# Altium PCB PCB1.PcbDoc
Units mm, origin at the board's own origin, x right, y up, seen from the top; angles counter-clockwise.
Board outline 46.61 x 47.37 mm, 2 copper layers (Top Layer, Bottom Layer); 27 components, 18 nets, 84 pads, 22 vias.
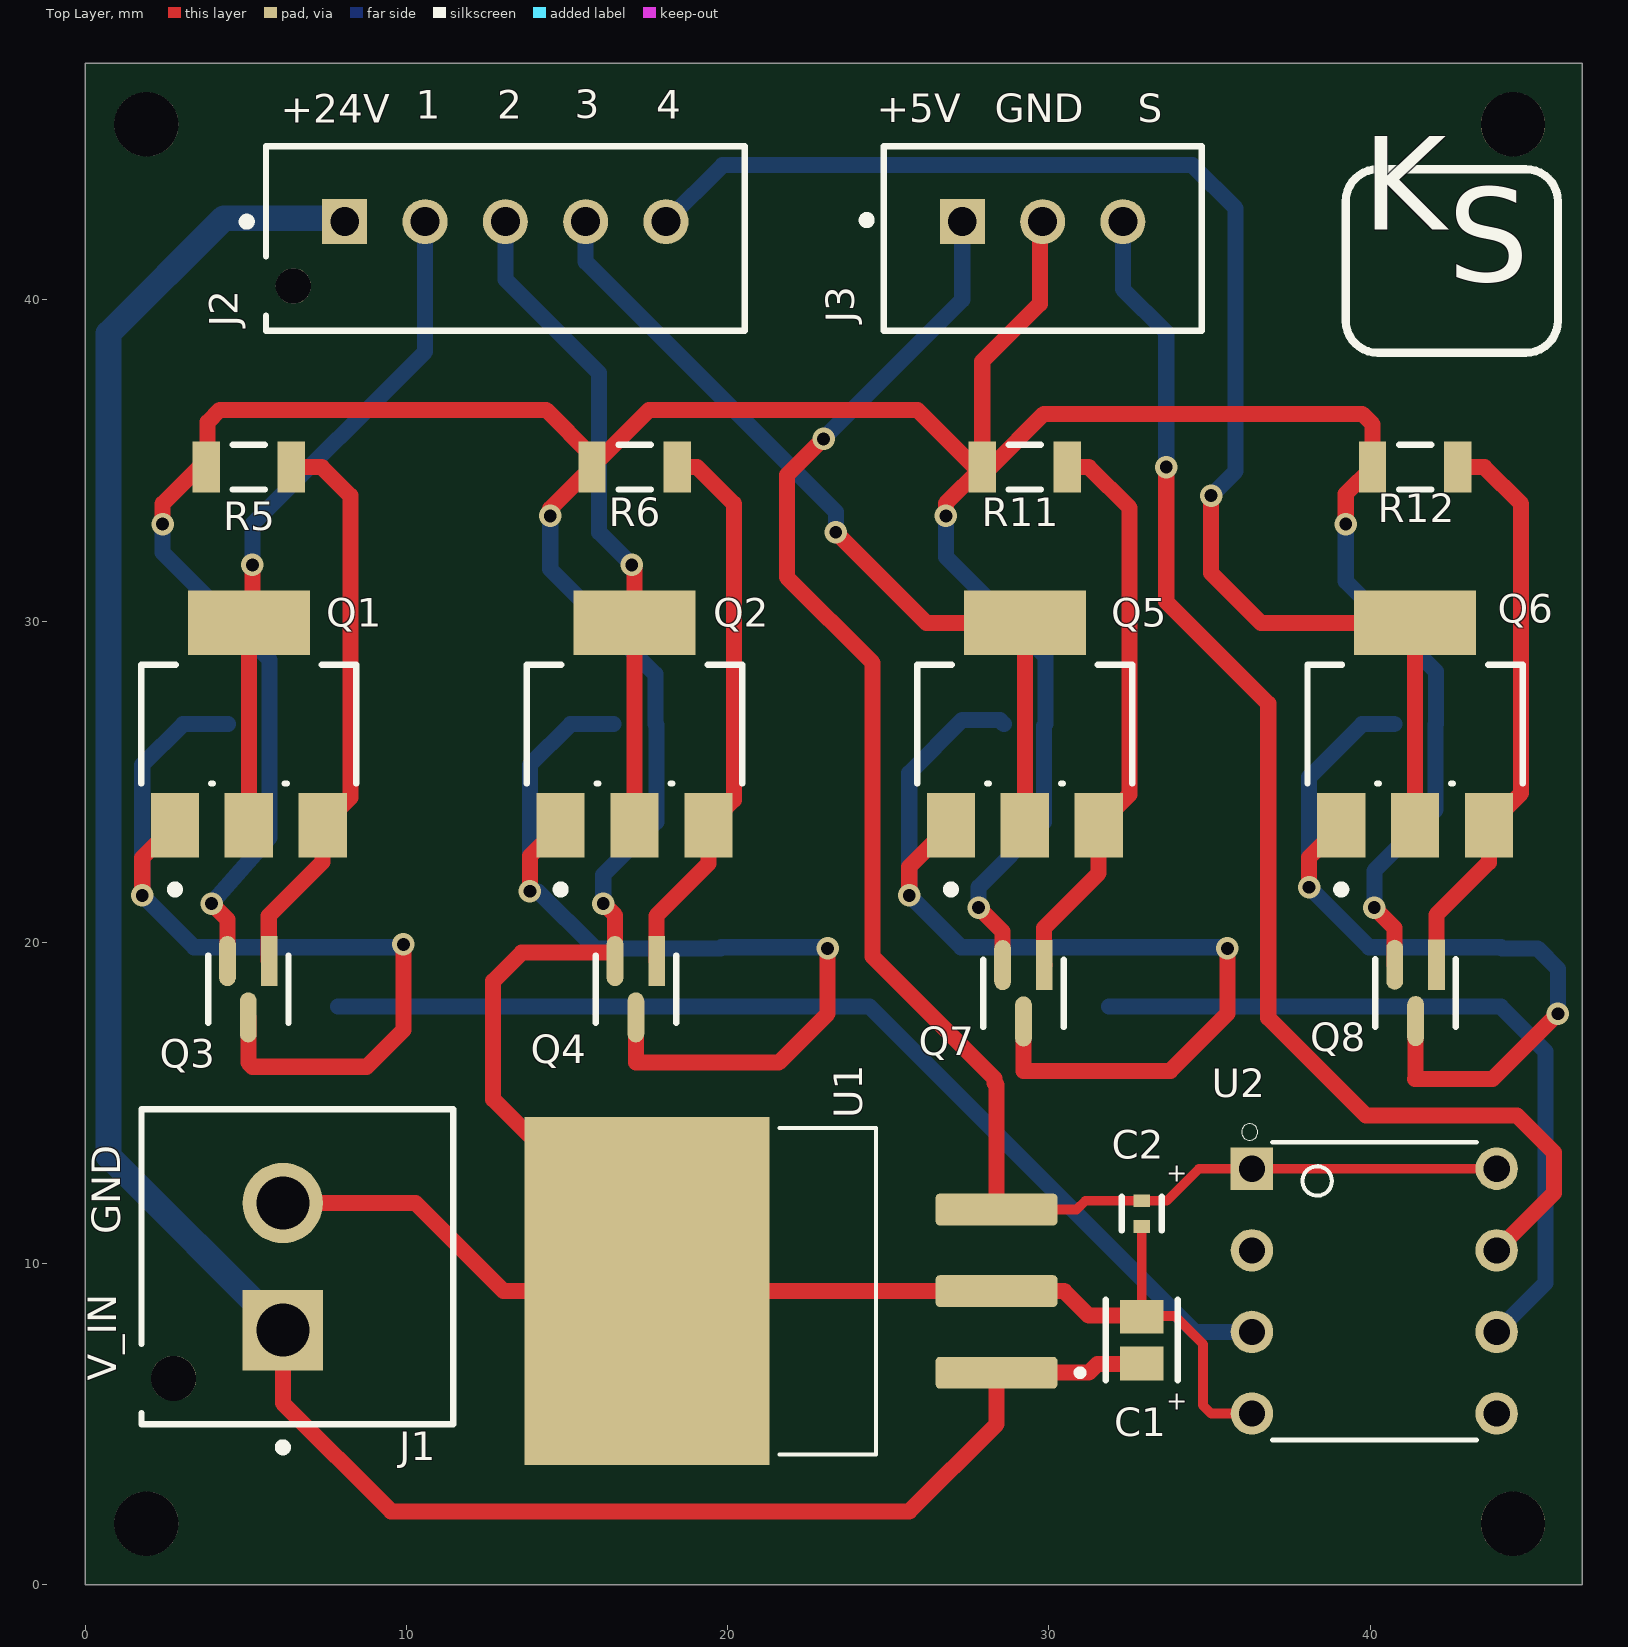
[diagram p0: Top Layer view]
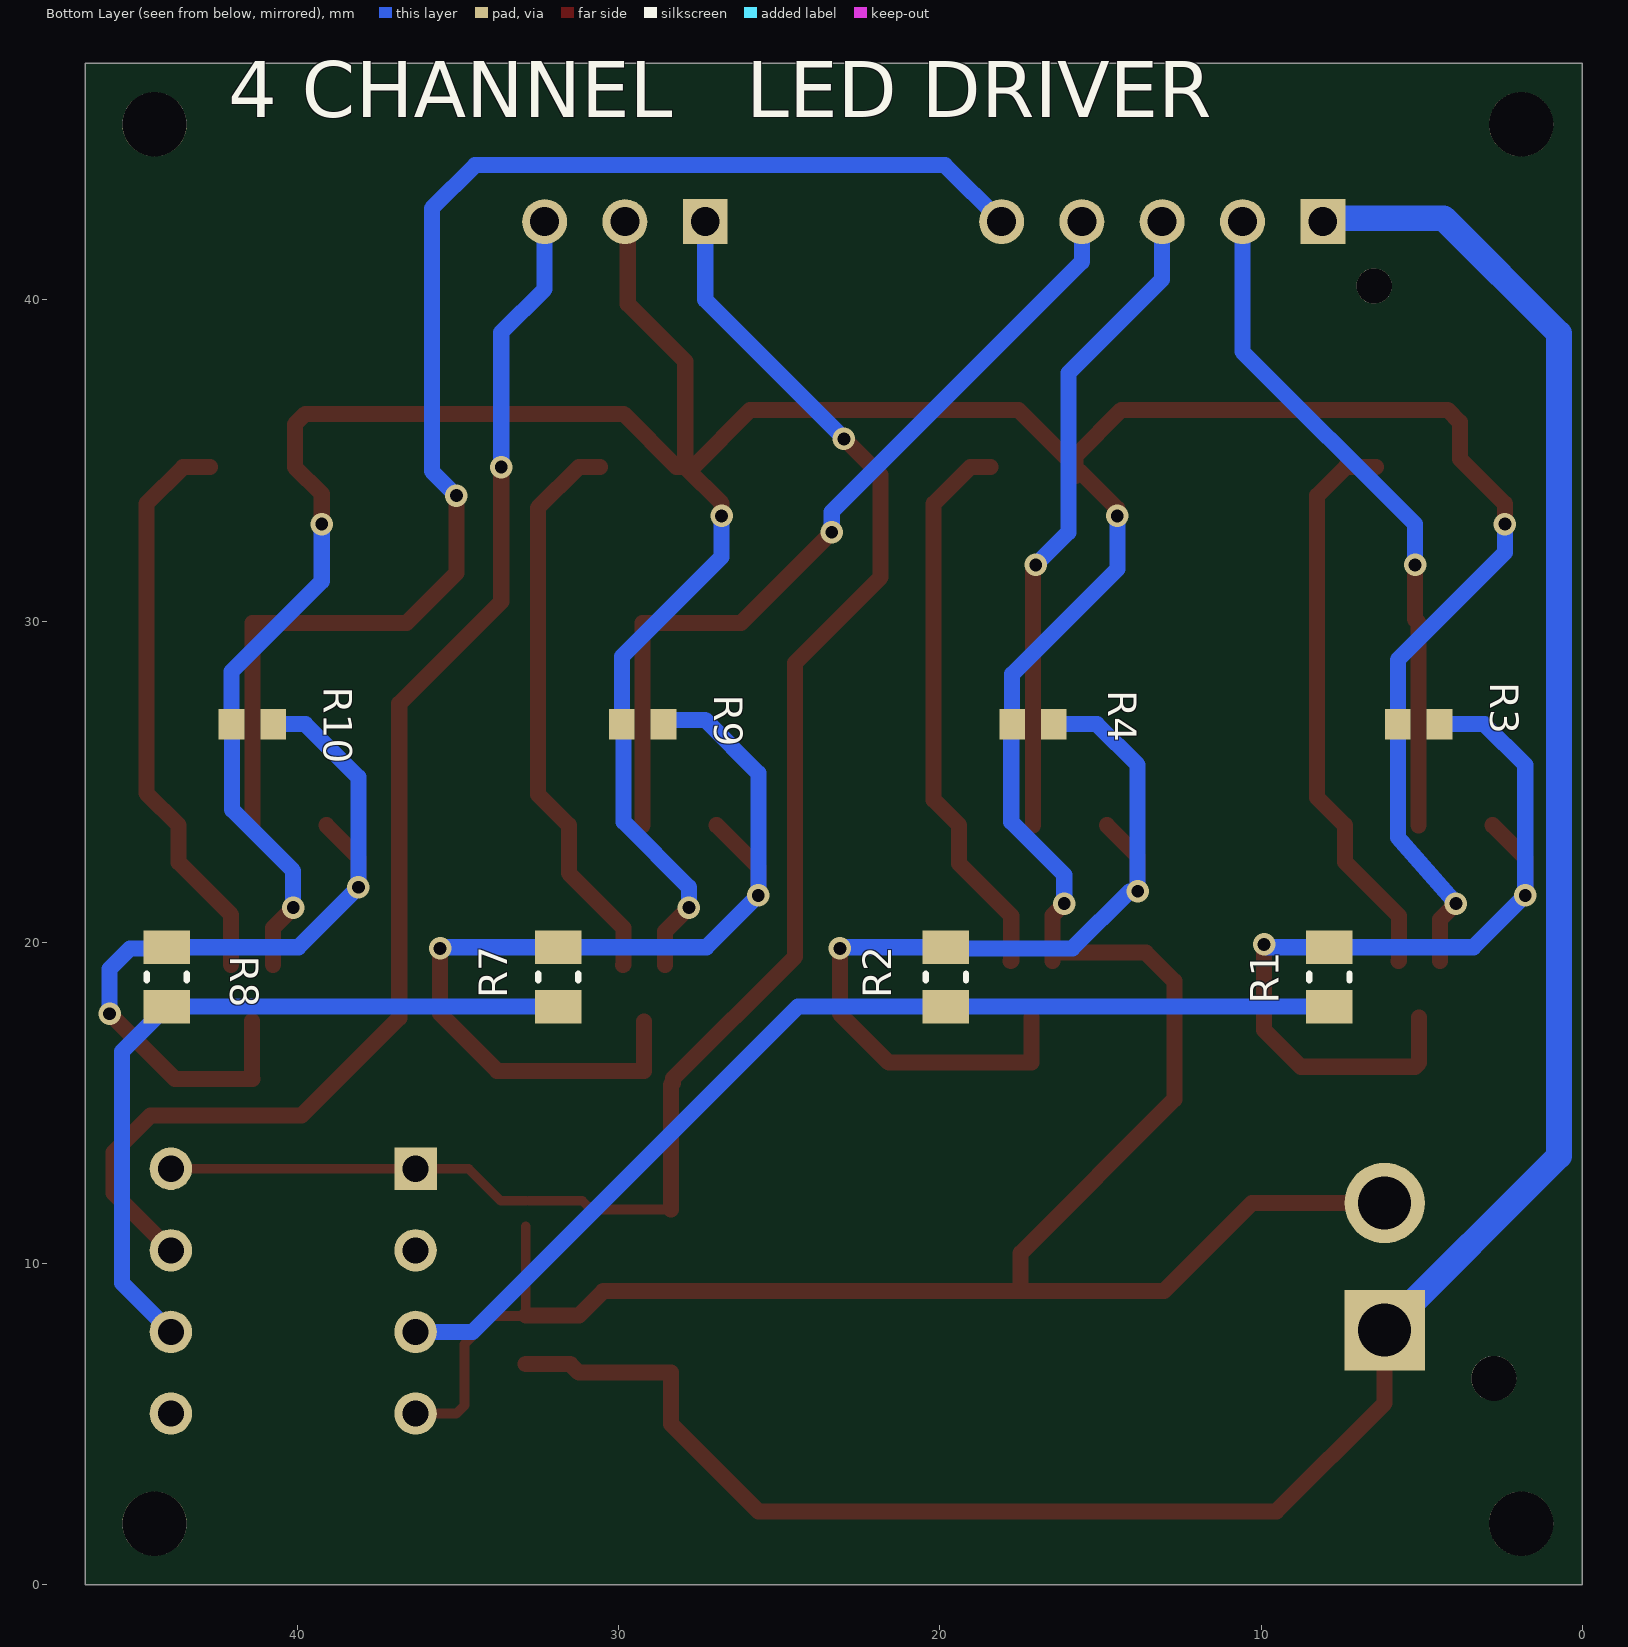
[diagram p1: Bottom Layer view, seen from below]
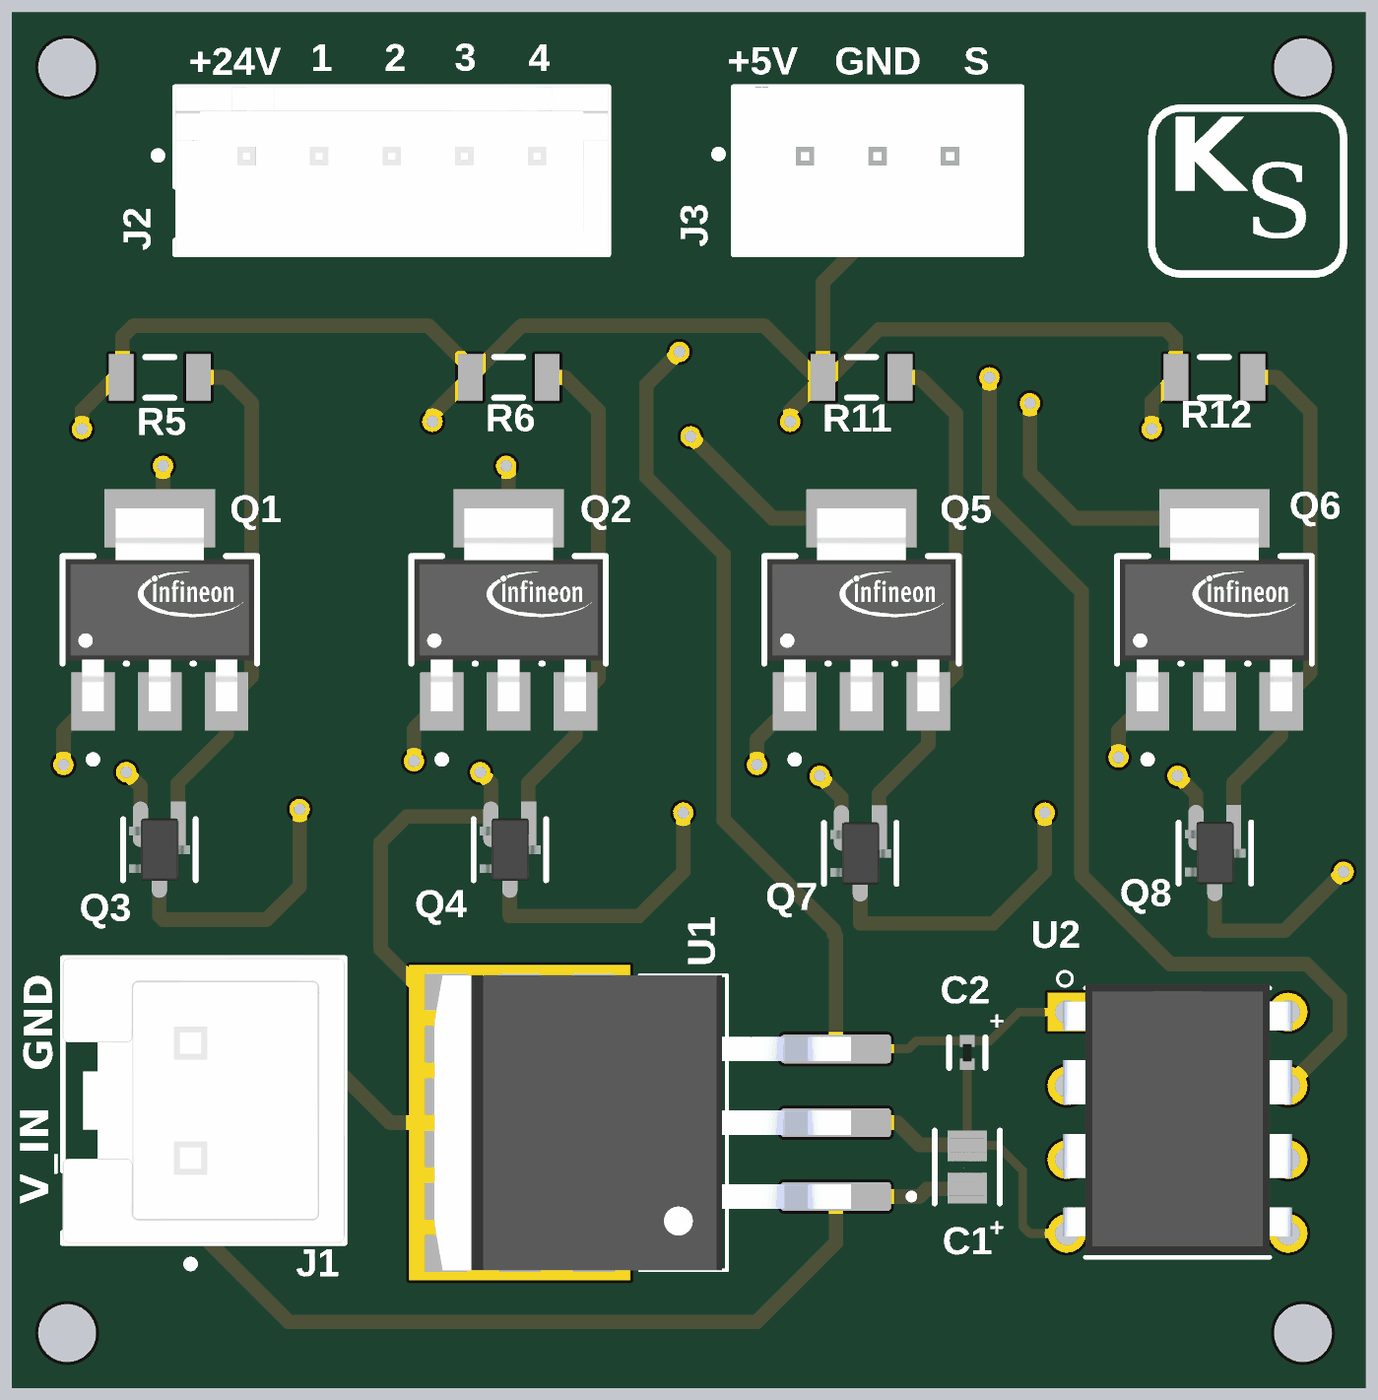
[diagram p2: 3D render of the assembled board from above, using the file's embedded part models]
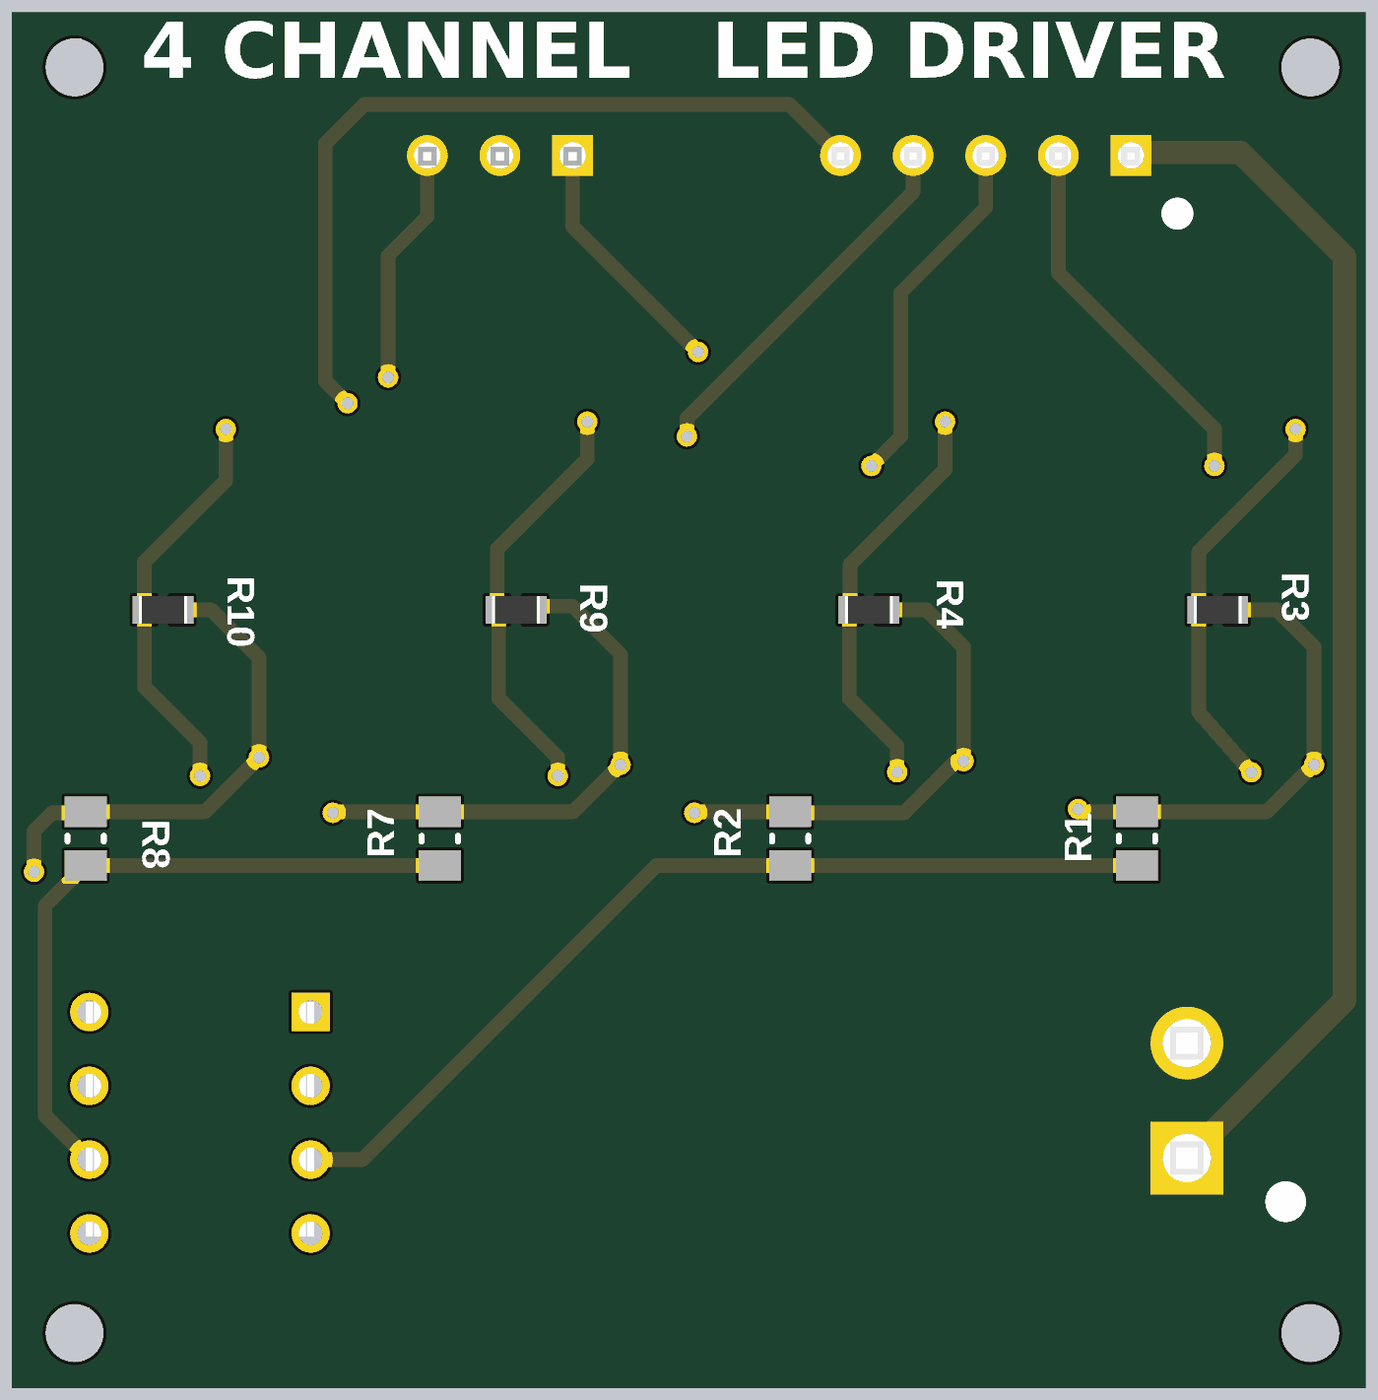
[diagram p3: 3D render of the assembled board from below, using the file's embedded part models]

## Layer stack, top to bottom
Top Solder: solder mask 0.0102, Solder Resist, Dk 3.5
Top Layer: signal copper 0.0356
Dielectric 1: dielectric 0.32, FR-4, Dk 4.8
Bottom Layer: signal copper 0.0356
Bottom Solder: solder mask 0.0102, Solder Resist, Dk 3.5

## Board outline
0,0 0,47.371 46.609,47.371 46.609,0

## Design rules (kind name [scope] priority, off if disabled: settings)
BoardOutlineClearance [All] p1: gap=0.254 ignorepadtopadclearanceinfootprint=FALSE except(0: Arc-SplitContinuation Track-SplitContinuation SMDPad-SplitContinuation THPad-SplitContinuation Via-SplitContinuation Fill-SplitContinuation Poly-SplitContinuation Region-SplitContinuation Text-SplitContinuation)
Clearance [All] p1: gap=0.254 ignorepadtopadclearanceinfootprint=FALSE except(0: Arc-Hole Track-Hole SMDPad-Hole THPad-Hole Via-Hole Fill-Hole Poly-Hole Region-Hole Text-Hole; 0.4: Arc-Arc Arc-Track Track-Track)
PolygonConnect [All] p1: connectstyle=Relief reliefconductorwidth=0.254 reliefentries=4 polygonreliefangle="90 Angle" airgapwidth=0.254
RoutingVias [All] p1: holewidth=0.4 width=0.6 viastyle="Through Hole" minholewidth=0 minwidth=0 maxholewidth=0.711 maxwidth=1.27
SilkToSilkClearance [All] p1: silktosilkclearance=0.15
SilkToSolderMaskClearance [IsPad] p1: minsilkscreentomaskgap=0.05 clearancetoexposedcopper=TRUE
SolderMaskExpansion [All] p1: expansion=0.102 istentingtop=FALSE
Width [All] p1: maxlimit=0.8 minlimit=0.3 preferedwidth=0.5
28 further rules are at their usual default settings.

## Classes and differential pairs
component class Sheet2: C2 J1 J3 U2
component class Sheet3: Q1 Q2 Q3 Q4 Q7 Q8 R1 R2 R3 R4 R9 R10 R11 R12

## Components (designator, comment, footprint, x,y, rotation, side; value= is the part's Value field where it differs from the comment)
C1 "CL21B104KBCNNNC" FP-CL21-IPC_C 32.893,7.62 r90 top value=0.10μF (schematic designator C2)
C2 "0.1uF 16V" FP-GRM15-MFG 32.893,11.557 r90 top (schematic designator C1)
J1 "B2P-VH-FB-B(LF)(SN)" FP-B2P-VH-FB-B_LF_SN-MFG 6.604,9.906 r270 top (schematic designator J2)
J2 "B5B-XH-AM(LF)(SN)" FP-B5B-XH-AM_LF_SN-MFG 13.081,41.91 r180 top (schematic designator J1)
J3 "B3B-XH-A(LF)(SN)" FP-B3B-XH-A_LF_SN-MFG 29.805,41.91 r0 top
Q1 "IRFL014N" FP-P-SOT223-3-MFG 5.095,26.797 r90 top
Q2 "IRFL014N" FP-P-SOT223-3-MFG 17.103,26.797 r90 top
Q3 "BC847CW,115" FP-SOT323-IPC_A 5.08,18.542 r270 top (schematic designator Q5)
Q4 "BC847CW,115" FP-SOT323-IPC_A 17.145,18.542 r270 top (schematic designator Q6)
Q5 "IRFL014N" FP-P-SOT223-3-MFG 29.252,26.797 r90 top (schematic designator Q3)
Q6 "IRFL014N" FP-P-SOT223-3-MFG 41.402,26.797 r90 top (schematic designator Q4)
Q7 "BC847CW,115" FP-SOT323-IPC_A 29.21,18.415 r270 top
Q8 "BC847CW,115" FP-SOT323-IPC_A 41.417,18.427 r270 top
R1 "680 ohm" RESC2013X50X30NL20T20 7.874,18.923 r90 bottom
R2 "680 ohm" RESC2013X50X30NL20T20 19.812,18.923 r90 bottom
R3 "10k 0.1W" RESC1609X50X30NL8T20 5.095,26.797 r180 bottom (schematic designator R5)
R4 "10k 0.1W" RESC1609X50X30NL8T20 17.103,26.797 r180 bottom (schematic designator R6)
R5 "2.4 ohm 1/4W" RESC3116X65X40LL10T20 5.095,34.798 r0 top (schematic designator R9)
R6 "2.4 ohm 1/4W" RESC3116X65X40LL10T20 17.103,34.798 r0 top (schematic designator R10)
R7 "680 ohm" RESC2013X50X30NL20T20 31.877,18.923 r90 bottom (schematic designator R3)
R8 "680 ohm" RESC2013X50X30NL20T20 44.069,18.923 r90 bottom (schematic designator R4)
R9 "10k 0.1W" RESC1609X50X30NL8T20 29.252,26.797 r180 bottom (schematic designator R7)
R10 "10k 0.1W" RESC1609X50X30NL8T20 41.402,26.797 r180 bottom (schematic designator R8)
R11 "2.4 ohm 1/4W" RESC3116X65X40LL10T20 29.252,34.798 r0 top
R12 "2.4 ohm 1/4W" RESC3116X65X40LL10T20 41.402,34.798 r0 top
U1 "LM7805SX/NOPB" TO254P1524X483-4N 21.971,9.144 r180 top (schematic designator U2)
U2 "ATTINY85-20PU" DIP762W46P254L927H533Q8B 40.132,9.144 r0 top (schematic designator U1)

## Footprints (in the part's own frame and the unit in brackets; to place one, negate y for a bottom-side part, rotate by r counter-clockwise, add the part's x,y. Pads: shape width x height; smd on the part's side, far side on the other; paste and mask are expansions set on the pad)
DIP762W46P254L927H533Q8B [mil]
  rect 52x52 hole 32: 1(-150,150)
  round 52 hole 32: 2(-150,50) 3(-150,-50) 4(-150,-150) 5(150,-150) 6(150,-50) 7(150,50) 8(150,150)
  silkscreen extent -163,-182 125,205, body extent -155,-178 155,188, height 212
FP-B2P-VH-FB-B_LF_SN-MFG [mm]
  rect 2.5x2.5 hole 1.65 paste-1000 mask+0: 1(1.98,-0.45)
  round 2.5 hole 1.65 paste-1000 mask+0: 2(-1.98,-0.45)
  round 1.4 hole 1.4 unplated paste-1000 mask+0: ""(3.48,-3.85)
  silkscreen extent -4.9,-4.85 5.75,4.85, body extent -5,-4.95 5,4.95, height 0.25
FP-B3B-XH-A_LF_SN-MFG [mm]
  rect 1.4x1.4 hole 0.9 paste-1000 mask+0: 1(-2.5,0.525)
  round 1.4 hole 0.9 paste-1000 mask+0: 2(0,0.525) 3(2.5,0.525)
  silkscreen extent -5.6,-2.88 4.95,2.88, body extent -5.05,-2.98 5.05,2.98, height 0.25
FP-B5B-XH-AM_LF_SN-MFG [mm]
  rect 1.4x1.4 hole 0.9 paste-1000 mask+0: 1(5,-0.525)
  round 1.4 hole 0.9 paste-1000 mask+0: 2(2.5,-0.525) 3(0,-0.525) 4(-2.5,-0.525) 5(-5,-0.525)
  round 1.1 hole 1.1 unplated paste-1000 mask+0: ""(6.6,1.475)
  silkscreen extent -7.45,-2.88 8.17,2.88, body extent -7.55,-2.98 7.55,2.98, height 0.25
FP-CL21-IPC_C [mm]
  rect 1.055x1.356 smd paste+0 mask+0: 1(-0.726,0) 2(0.726,0)
  silkscreen extent -1.25,-1.12 1.25,1.12, body extent -1.35,-0.82 1.35,0.82, height 0.25
FP-GRM15-MFG [mm]
  rect 0.4x0.5 smd paste+0 mask+0: 1(-0.4,0) 2(0.4,0)
  silkscreen extent -0.53,-0.63 0.53,0.63, body extent -0.7,-0.38 0.7,0.38, height 0.25
FP-P-SOT223-3-MFG [mm]
  rect 2x1.5 smd paste+0 mask+0: 1(-3.15,2.3) 2(-3.15,0) 3(-3.15,-2.3)
  rect 2x3.8 smd paste+0 mask+0: 4(3.15,0)
  silkscreen extent -5.27,-3.35 1.85,3.35, body extent -4.25,-3.45 4.25,3.45, height 0.25
FP-SOT323-IPC_A [mm]
  rect 1.559x0.522 smd paste+0 mask+0: 1(-0.877,0.65)
  rrect100% 1.559x0.522 smd paste+0 mask+0: 2(-0.877,-0.65) 3(0.877,0)
  silkscreen extent -1.05,-1.25 1.05,1.25, body extent -2.16,-1.5 2.16,1.5, height 0.25
RESC1609X50X30NL8T20 [mm] "Chip Resistor, 2-Leads, Body 1.65x0.95mm, IPC Medium Density"
  rect 0.8x0.95 smd: 1(-0.65,0) 2(0.65,0)
  body extent -0.82,-0.48 0.82,0.48, height 0.5
RESC2013X50X30NL20T20 [mm] "Chip Resistor, 2-Leads, Body 2.00x1.25mm, IPC Medium Density"
  rect 1.05x1.45 smd: 1(-0.925,0) 2(0.925,0)
  silkscreen extent -0.1,-0.63 0.1,0.63, body extent -1.1,-0.72 1.1,0.72, height 0.5
RESC3116X65X40LL10T20 [mm] "Chip Resistor, 2-Leads, Body 3.10x1.60mm, IPC High Density"
  rect 0.85x1.6 smd: 1(-1.325,0) 2(1.325,0)
  silkscreen extent -0.5,-0.7 0.5,0.7, body extent -1.6,-0.85 1.6,0.85, height 0.65
TO254P1524X483-4N [mm]
  rrect25% 3.79x0.99 smd: 1(-6.4,2.54) 2(-6.4,0) 3(-6.4,-2.54)
  rect 7.62x10.84 smd paste-6: 4(4.48,0)
  silkscreen extent -9.1,-5.08 0.35,5.08, body extent -6.92,-5.08 7.43,5.08, height 4.8

## Part data
C1: library part CMP-2100-03641-2, "CAP CER 0.1UF 16V X7R 0402", Capacitance=0.10μF, Manufacturer=Murata, Manufacturer Part Number=GRM155R71C104KA88D, Package=GRM15, Temperature="-55°C to +125°C", Temperature Characteristic=X7R, Temperature Range High=+125°C, Temperature Range Low=-55°C, Tolerance=10%, Voltage Rating=16Vdc, Category=Cap, ComponentLink2Description=Datasheet, ComponentLink2URL=https://search.murata.co.jp/Ceramy/image/img/A01X/G101/ENG/GRM155R71H471KA01-01A.pdf, Device Class L1="Passive Components", Device Class L2=Capacitors, Device Class L3="Ceramic Capacitors", Digikey Description="CAP CER 0.1UF 16V X7R 0402", Height=0.55mm, Ipc Land Pattern Name=CAPC10050X219, Lead Free=yes, Material=Ceramic, Mouser Description="0402 0.1 uF 16V ±10 % Tolerance X7R SMT Multilayer Ceramic Capacitor", Octopart=https://octopart.com/grm155r71c104ka88d-murata-196880, RoHS=TRUE, Standoff Height=0mm
C2: library part CMP-2000-05017-2, "CL21 Series 0805 100nF 50V ±10% Tolerance X7R Multilayer Ceramic Chip Capacitor", Capacitance=100nF, Case Code (Imperial)=0805, Case Code (Metric)=2012, Dielectric=X7R, Max Operating Temperature=125°C, Min Operating Temperature=-55°C, Tolerance=10%, Voltage=50V, Case/Package=0805, Contact Plating=Tin, Depth=1.25mm, Height=0.85mm, Lead Free="Lead Free", Length=2mm, Material=Ceramic, Mount="Surface Mount", Packaging="Tape and Reel", Radiation Hardening=No, Thickness=0.037inch, Voltage Rating=50V, Voltage Rating (DC)=50V, Width=0.049inch
J1: library part CMP-17439-000304-1, "CONN HEADER VERT 5POS 2.5MM", Color=Green, Contact Resistance=20mR, Flammability Rating="UL94 V-0", Housing Color=White, Insulation Color=Natural, Max Current Rating=3A, Max Operating Temperature=85°C, Max Voltage Rating (AC)=250V, Min Operating Temperature=-25°C, Connector Type=Header, Contact Finish - Mating=TIN, Contact Material=Brass, Contact Plating=Copper, Contact Shape=Square, Contact Type="Male Pin", Depth=5.75mm, Fastening Type=Detent, Housing Material=Polyamide, Insulation Material=Nylon, Lead Free="Lead Free", Length=14.9mm, Mated Stacking Heights=9.8mm, Mount="Through Hole", Number of Positions=5, Number of Rows=1, Orientation=Straight, Packaging=Bulk, Pitch=2.5mm, Series=XH, Termination=Solder, Voltage Rating=250V
J2: library part CMP-17439-000031-1, "CONN HEADER VERT 2POS 3.96MM", Color=Natural, Package Quantity=250, Connector Type="Male Pin", Contact Plating=Tin, Contact Type="Male Pin", Fastening Type=Ramp, Lead Free="Lead Free", Mount="Through Hole", Number of Positions=2, Number of Rows=1, Packaging=Bulk, Pitch=0.156inch, Series=VH, Termination=Solder
J3: library part CMP-17439-000014-3, "CONN HEADER VERT 3POS 2.5MM", Color=Natural, Contact Resistance=20mR, Current Rating=3A, Flammability Rating="UL94 V-0", Housing Color=White, Insulation Resistance=1GR, Max Operating Temperature=85°C, Max Voltage Rating (AC)=250V, Min Operating Temperature=-25°C, Connector Type=Header, Contact Finish - Mating=TIN, Contact Material=Brass, Contact Plating=Tin, Contact Shape=Square, Contact Type="Male Pin", Depth=5.75mm, Fastening Type=Detent, Gender=Male, Housing Material=Polyamide, Insulation Color=Natural, Insulation Material=Nylon, Lead Free="Lead Free", Lead Pitch=2.5mm, Length=9.9mm, Max Current Rating=3A, Max Voltage Rating (DC)=250V, Mount="Through Hole", Number of Contacts=3, Number of Positions=3, Number of Rows=1, Orientation=Straight, Packaging=Bulk, Pitch=2.5mm, REACH SVHC="No SVHC", Series=XH, Termination=Solder, Voltage Rating=250V, Voltage Rating (AC)=250V, Wire/Cable Gauge=22AWG
Q1 Q2 Q5 Q7: library part CMP-32901-000109-1, "MOSFET N-CH 55V 1.9A SOT223", Continuous Drain Current=1.9A, Drain To Source Breakdown Voltage=55V, Drain To Source Resistance=0.16Ω, Gate To Source Voltage=20V, Input Capacitace At Vds="190pF @ 25V", Manufacturer=Infineon, Manufacturer Part Number=IRFL014NTRPBF, Max Forward Diode Voltage=1V, Max Junction Temp=+150°C, Package=P-SOT223-3, Power Dissipation=1W, Pulse Drain Current=15A, Temperature="-55°C to +150°C", Temperature Range Low=-55°C, Automotive=No, Category=Trans, ComponentLink2Description=Datasheet, ComponentLink2URL=https://www.infineon.com/dgdl/irfl014npbf.pdf?fileId=5546d462533600a401535627c5321fac, Depletion Mode=False, Device Class L1="Discrete Semiconductors", Device Class L2=Transistors, Device Class L3=MOSFETs, Digikey Description="MOSFET N-CH 55V 1.9A SOT223", Drain To Source Voltage=55V, Footprint Url=https://www.infineon.com/dgdl/po-sot223.pdf?fileId=5546d462580663ef0158068bea690191, Gate Charge At Vgs="7nC @ 10V", Height=1.8mm, Ipc Land Pattern Name=SOT230P700X168-4, Lead Free=Yes, Number Of Channels=1, Number Of N Channels=1, Obsolete Part=false, Octopart=https://octopart.com/irfl014ntrpbf-infineon-65874001, Reverse Recovery Charge=64nC, Reverse Recovery Time=41ns, RoHS=TRUE, Rthja Max=120°C/W, Standoff Height=0.061mm, Temperature Range High=+150°C, Threshold Vgs Max=4V, Threshold Vgs Min=2V, Turn Off Delay Time=12ns, Turn On Delay Time=6.6ns
Q3 Q4 Q6 Q8: library part CMP-14406-000045-1, "TRANS NPN 45V 100MA SOT323", RoHS Compliant=Yes
R1 R2 R6 R7: library part CMP-2001-04066-1, Manufacturer="Vishay Dale", Part Number=CRCW0805680RFKEA
R3 R4 R8 R11: library part CMP-1666-00005-4, "Chip Resistor, 10 KOhm, +/- 1%, 100 mW, -55 to 155 degC, 0603 (1608 Metric), RoHS, Tape and Reel", Manufacturer="Vishay Semiconductor", Max Operating Temperature="155 degC", Min Operating Temperature="-55 degC", Package Quantity=5000, Voltage Rating="75 V", ComponentLink1Description="Manufacturer URL", ComponentLink1URL=http://www.vishay.com/, ComponentLink2Description=Datasheet, ComponentLink2URL=https://datasheet.ciiva.com/11809/0900766b80d98afc-11809037.pdf, DatasheetVersion=06/2012, Height="0.45 mm", Length="1.55 mm", Mounting Technology="Surface Mount", PackageDescription="2-Pin Surface Mount Device, Body 1.575 x 0.85 mm", PackageReference=0603, Packaging="Tape and Reel", REACH SVHC=Unknown, RoHSCompliant=true
R5 R9 R10 R12: library part CMP-2003-03693-1, Manufacturer=Yageo, Part Number=RC1206FR-072R4L
U1: "1.5-A, 30-V, linear voltage regulator 3-DDPAK/TO-263 0 to 125", Package="TO-263-3 Texas Instruments", Availability=Warning, DigiKey-Purchase-URL=https://snapeda.com/shop?store=DigiKey&id=545072, MF="Texas Instruments", Mouser-Purchase-URL=https://snapeda.com/shop?store=Mouser&id=545072, MP=LM7805SX/NOPB, Price=None, SnapEDA_Link=https://www.snapeda.com/parts/LM7805SX/NOPB/Texas%20Instruments/view-part/545072/?ref=snap, Texas_Instruments-Purchase-URL=https://snapeda.com/shop?store=Texas+Instruments&id=545072
U2: "AVR AVRÂ® ATtiny, Functional Safety (FuSa) Microcontroller IC 8-Bit 20MHz 8KB (4K x 16) FLASH 8-PDIP", Package="DIP-8 Atmel", Availability=Good, Check_prices=https://www.snapeda.com/parts/ATTINY85-20PU/Microchip/view-part/42827/?ref=eda, MF=Microchip, MP=ATTINY85-20PU, Price=None, Purchase-URL=https://pricing.snapeda.com/search/part/ATTINY85-20PU/?ref=eda, SnapEDA_Link=https://www.snapeda.com/parts/ATTINY85-20PU/Microchip/view-part/42827/?ref=snap

## Free pads (board coordinates)
  round 2 hole 2 unplated: 31(1.905,1.905) 31(1.905,45.466) 31(44.45,1.905) 31(44.45,45.466)

## Via types
v1: diameter 0.7, hole 0.4, Top Layer to Bottom Layer, 22 vias

## Nets (pads, with @x,y where several pads share a name; then routed paths per layer and width w, separated by ;. In a path a pad name is that pad's centre, name@x,y a point inside that pad or via, vN(x,y) a via of type N, cw(c..) or ccw(c..) an arc to the next point about the centre after c; other vN are vias at no path point)
+5: C2.2 J3.1 U1.3 U2.1 U2.8 | length 51.7
  Top Layer w0.3: U1.3 30.861,11.684 31.134,11.957 C2.2@32.796,11.957 ; C2.2 33.674,11.957 34.671,12.954 U2.1 U2.8
  Top Layer w0.5: v1(22.987,35.676) 22.976,35.676 21.844,34.544 21.844,31.369 24.511,28.702 24.511,19.558 28.31,15.759 28.31,15.629 28.371,15.568 U1.3
  Bottom Layer w0.5: v1(22.987,35.676) 22.987,35.687 27.305,40.005 J3.1
+24V: C1.1 J1.1 J2.1 U1.1 | length 75.4
  Top Layer w0.5: J1.1 6.154,5.657 9.525,2.286 25.654,2.286 28.371,5.003 U1.1 31.242,6.604 31.508,6.87 C1.1@32.893,6.87
  Bottom Layer w0.8: J1.1 0.728,13.352 0.728,21.028 0.728,25.962 0.728,38.955 4.318,42.545 7.971,42.545 J2.1
CH1: J2.2 Q1.2 Q1.4 | length 21.1
  Top Layer w0.5: Q1.2 Q1.4 5.207,30.059 v1(5.207,31.75)
  Bottom Layer w0.5: v1(5.207,31.75) 5.207,33.02 10.581,38.394 J2.2
CH2: J2.3 Q2.2 Q2.4 | length 20.5
  Top Layer w0.5: v1(17.018,31.75) 17.103,31.665 Q2.4 Q2.2
  Bottom Layer w0.5: J2.3 13.081,40.64 16.002,37.719 16.002,32.766 v1(17.018,31.75)
CH3: J2.4 Q5.2 Q5.4 | length 26.2
  Top Layer w0.5: v1(23.368,32.766) 26.187,29.947 Q5.4 Q5.2
  Bottom Layer w0.5: J2.4 15.581,41.188 22.606,34.163 23.368,33.401 v1(23.368,32.766)
CH4: J2.5 Q6.2 Q6.4 | length 44
  Top Layer w0.5: v1(35.052,33.909) 35.052,31.496 36.601,29.947 Q6.4 Q6.2
  Bottom Layer w0.5: J2.5 19.842,44.196 34.466,44.196 35.814,42.848 35.814,34.671 v1(35.052,33.909)
Cool_white: R1.1 R2.1 U2.3 | length 32.6
  Bottom Layer w0.5: R1.1 R2.1 24.42,17.998 34.544,7.874 U2.3
GND: C1.2 C2.1 J1.2 J3.2 Q3.2 Q4.2 Q7.2 Q8.2 R3.1 R4.1 R5.1 R6.1 R9.1 R10.1 R11.1 R12.1 U1.2 U1.4 U2.4 | length 176.2
  Top Layer w0.3: C2.1 32.893,8.37 33.921,8.37 34.798,7.493 34.798,5.588 35.052,5.334 U2.4
  Top Layer w0.5: v1(2.413,33.02) 2.413,33.655 3.81,35.052 3.81,36.195 4.191,36.576 14.351,36.576 15.778,35.149 R6.1 ; v1(3.937,21.209) 4.43,20.716 Q3.2 ; J1.2 10.287,11.886 13.029,9.144 U1.4 ; v1(14.478,33.274) 14.478,33.498 R6.1@15.636,34.656 ; R6.1@15.778,34.514 R6.1 ; v1(16.129,21.209) 16.495,20.843 Q4.2 ; Q4.2@16.453,19.685 13.589,19.685 12.7,18.796 12.7,15.113 17.491,10.322 U1.4 ; v1(26.797,33.274) 26.797,33.668 R11.1 ; v1(27.813,21.082) 28.56,20.335 Q7.2 ; J3.2 29.718,42.348 29.718,39.878 27.927,38.087 27.927,35.166 R11.1 ; C1.2@32.881,8.382 31.242,8.382 30.48,9.144 U1.2 U1.4 ; v1(39.243,33.02) 39.243,33.964 R12.1 40.077,36.123 39.751,36.449 29.845,36.449 28.194,34.798 R11.1 ; v1(40.132,21.082) 40.767,20.447 Q8.2 ; R6.1 15.953,34.974 17.556,36.576 25.908,36.576 27.686,34.798 R11.1
  Bottom Layer w0.5: v1(2.413,33.02) 2.413,32.131 5.745,28.799 R3.1 5.745,23.271 v1(3.937,21.209) ; v1(14.478,33.274) 14.478,31.623 17.753,28.348 R4.1 17.78,26.77 17.78,23.749 16.129,22.098 v1(16.129,21.209) ; v1(26.797,33.274) 26.797,32.004 29.902,28.899 R9.1 29.845,26.74 29.845,23.749 27.813,21.717 v1(27.813,21.082) ; v1(39.243,33.02) 39.243,31.242 39.389,31.096 42.052,28.433 R10.1 42.037,26.782 42.037,24.13 40.132,22.225 v1(40.132,21.082)
NetQ1_1: Q1.1 Q3.3 R1.2 R3.2 | length 28.1
  Top Layer w0.5: v1(1.778,21.463) 1.778,22.63 Q1.1 ; Q3.3 5.08,16.256 5.207,16.129 8.763,16.129 9.906,17.272 v1(9.906,19.939)
  Bottom Layer w0.5: R3.2 3.048,26.797 1.778,25.527 v1(1.778,21.463) 3.393,19.848 R1.2 9.815,19.848 v1(9.906,19.939)
NetQ1_3: Q1.3 Q3.1 R5.2 | length 17.8
  Top Layer w0.5: Q3.1 5.715,19.434 5.715,20.828 7.395,22.508 Q1.3 8.255,24.507 8.255,33.909 7.366,34.798 R5.2
NetQ2_1: Q2.1 Q4.3 R2.2 R4.2 | length 29.6
  Top Layer w0.5: v1(13.843,21.59) 13.843,22.687 Q2.1 ; Q4.3 17.145,16.256 21.59,16.256 23.114,17.78 v1(23.114,19.812)
  Bottom Layer w0.5: R4.2 15.113,26.797 13.843,25.527 v1(13.843,21.59) 14.097,21.59 15.875,19.812 19.776,19.812 R2.2 23.078,19.848 v1(23.114,19.812)
NetQ2_3: Q2.3 Q4.1 R6.2 | length 17.5
  Top Layer w0.5: Q4.1 17.78,19.434 17.78,20.828 19.403,22.451 Q2.3 20.193,24.437 20.193,33.655 19.05,34.798 R6.2
NetQ3_1: Q5.1 Q7.3 R7.2 R9.2 | length 31.5
  Top Layer w0.5: v1(25.654,21.463) 25.654,22.349 Q5.1 ; Q7.3 29.21,16.002 33.782,16.002 35.56,17.78 v1(35.56,19.812)
  Bottom Layer w0.5: R9.2 28.475,26.924 27.305,26.924 25.654,25.273 v1(25.654,21.463) 27.269,19.848 R7.2 35.524,19.848 v1(35.56,19.812)
NetQ3_3: Q5.3 Q7.1 R11.2 | length 17.8
  Top Layer w0.5: Q7.1 29.845,19.307 29.845,20.447 31.552,22.154 Q5.3 32.512,24.607 32.512,33.528 31.242,34.798 R11.2
NetQ4_1: Q6.1 Q8.3 R8.2 R10.2 | length 26.4
  Top Layer w0.5: v1(38.1,21.717) 38.1,22.645 Q6.1 ; Q8.3 41.417,15.763 41.402,15.748 43.815,15.748 44.704,16.637 v1(45.847,17.78)
  Bottom Layer w0.5: R10.2 39.751,26.797 38.1,25.146 v1(38.1,21.717) 39.969,19.848 R8.2 44.105,19.812 45.212,19.812 45.847,19.177 v1(45.847,17.78)
NetQ4_3: Q6.3 Q8.1 R12.2 | length 17.9
  Top Layer w0.5: Q8.1 42.067,20.858 43.702,22.493 Q6.3 44.704,24.649 44.704,33.655 43.561,34.798 R12.2
Signal: J3.3 U2.7 | length 41.1
  Top Layer w0.5: v1(33.655,34.798) 33.655,30.607 36.83,27.432 36.83,17.653 39.878,14.605 44.577,14.605 45.72,13.462 45.72,12.192 U2.7
  Bottom Layer w0.5: J3.3 32.305,40.339 33.655,38.989 v1(33.655,34.798)
Warm_white: R7.1 R8.1 U2.6 | length 23.5
  Bottom Layer w0.5: R7.1 R8.1 45.466,16.601 45.466,9.398 U2.6
pads on no net: J1. J2. U2.2 U2.5

## Silkscreen, mask and mechanical layers (free items; w line width, h text height)
Top Overlay:
  lines w0.254: 39.243,39.354 ccw(c40.243,39.354) 40.243,38.354 44.847,38.354 ccw(c44.847,39.354) 45.847,39.354 45.847,43.069 ccw(c44.847,43.069) 44.847,44.069 40.243,44.069 ccw(c40.243,43.069) 39.243,43.069 39.243,39.354
  text "3" at 15.24,45.357 h1.52
  text "1" at 10.287,45.339 h1.52
  text "2" at 12.827,45.339 h1.52
  text "4" at 17.78,45.339 h1.52
  text "+5V" at 24.638,45.23 h1.52
  text "GND" at 28.321,45.23 h1.52
  text "S" at 32.766,45.23 h1.52
  text "+24V" at 6.096,45.212 h1.52
  text "K" at 39.751,41.225 h5
  text "S" at 42.418,39.624 h5
  text "+" at 33.655,12.354 h1
  text "GND" at 1.384,10.922 h1.52 r90
  text "V_IN" at 1.262,6.35 h1.52 r90
  text "+" at 33.655,5.242 h1
Bottom Overlay:
  text "4 CHANNEL   LED DRIVER" at 42.161,45.116 h3
Mechanical 1:
  the board outline again, w0.254
Dimensions:
  lines w0.254: -10.846,1.509 -10.338,-0.015 ; -10.846,45.832 -10.338,47.356 ; -10.592,-0.015 -10.084,-0.015 ; -10.592,47.356 -10.084,47.356 ; -10.338,15.773 -10.338,-0.015 ; -10.338,31.567 -10.338,47.356 ; -9.83,1.509 -10.338,-0.015 ; -9.83,45.832 -10.338,47.356 ; 0.213,55.541 0.214,56.049 ; 1.736,55.282 0.213,55.795 ; 1.739,56.298 0.213,55.795 ; 15.494,55.753 0.213,55.795 ; 31.542,55.709 46.822,55.668 ; 45.297,55.164 46.822,55.668 ; 45.3,56.18 46.822,55.668 ; 46.822,55.414 46.823,55.922
  text "46.609 (mm)" at 15.746,54.838 h1.52 r359.84
  text "47.371 (mm)" at -9.423,16.027 h1.52 r90